# Altium PCB PCB3.PcbDoc (part 3 of 4)
Units mm, origin at the board's own origin, x right, y up, seen from the top; angles counter-clockwise.
Board outline 160 x 194 mm, 2 copper layers (Top Layer, Bottom Layer); 456 components, 297 nets, 1240 pads, 521 vias.
Unrouted connection lines stored in the file: 258.
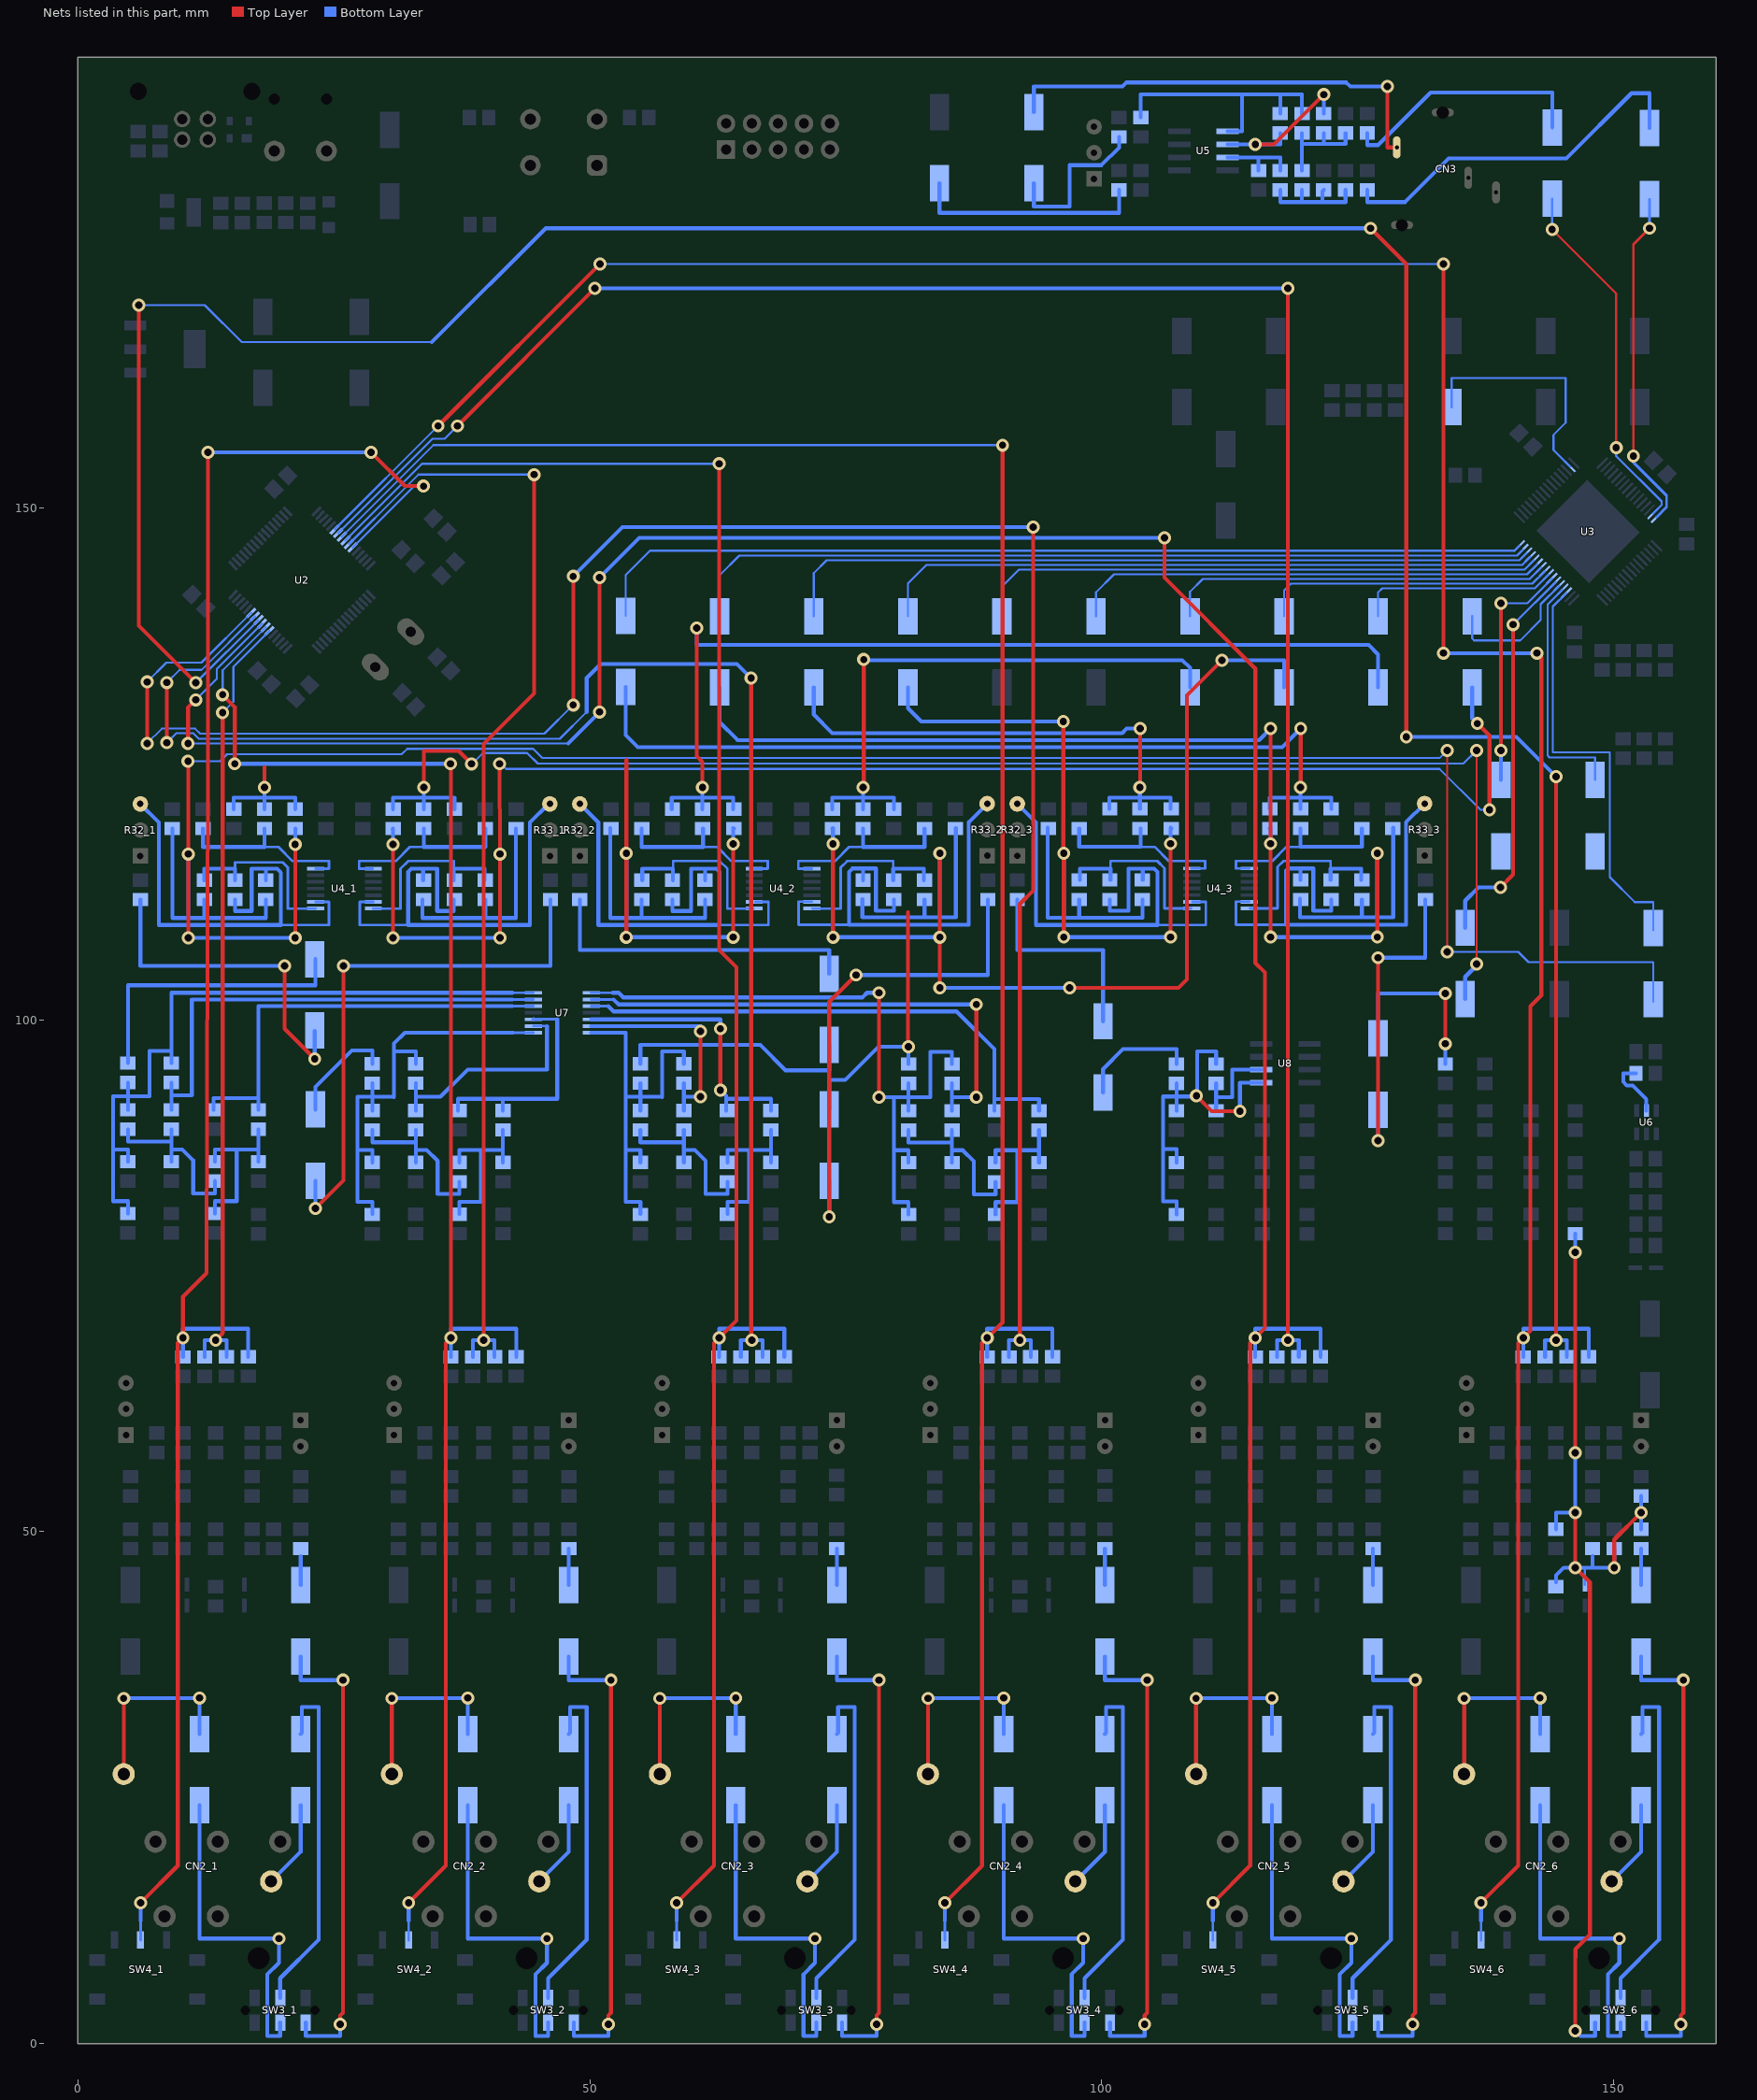
[diagram p3: the nets of this part, all layers, seen from the top]

## Via types
v1: diameter 1.27, hole 0.711, Top Layer to Bottom Layer, 517 vias
v2: diameter 1.4, hole 0.7, Top Layer to Bottom Layer, 4 vias

## Nets (pads, with @x,y where several pads share a name; then routed paths per layer and width w, separated by ;. In a path a pad name is that pad's centre, name@x,y a point inside that pad or via, vN(x,y) a via of type N, cw(c..) or ccw(c..) an arc to the next point about the centre after c; other vN are vias at no path point) (continued)
NetC17_6_2: C17_6.2 D4_6.1 R9_6.1 R10_6.2 R73.2 R74.1 R140.1 R147_6.1 SW3_6.6 | length 107
  Top Layer w0.381: v1(146.25,1.25) 146.25,8.411 146.267,8.428 146.267,9.205 147.687,10.625 147.687,45.042 v1(146.25,46.48) v1(146.25,51.855) ; v1(146.25,57.687) 146.25,71.062 v1(146.25,77.287) ; v1(150.062,46.48) 150.062,49.23 v1(152.687,51.855)
  Bottom Layer w0.254: D4_6.1@147.188,44.815 147.187,46.48
  Bottom Layer w0.381: C17_6.2@144.375,45.055 144.375,45.73 145.125,46.48 v1(146.25,46.48) 147.187,46.48 147.937,46.48 ; R9_6.1@144.375,50.242 144.375,51.855 v1(146.25,51.855) v1(146.25,57.687) ; v1(146.25,1.25) 146.75,0.75 148.187,0.75 SW3_6.6@148.187,2.05 ; v1(146.25,77.287) R140.1@146.25,79.112 ; 147.937,47.592 147.937,46.48 ; R73.2@150.063,48.342 v1(150.062,46.48) 147.937,46.48 ; R10_6.2@152.688,50.242 v1(152.687,51.855) R74.1@152.687,53.48
NetC18_1_1: C18_1.1 R10_1.1 | length 2.8
  Bottom Layer w0.381: C18_1.1@21.75,44.772 21.75,47.592
NetC18_1_2: C18_1.2 SW3_1.4 | length 46
  Top Layer w0.381: v1(25.625,1.875) 25.625,2.75 25.875,3 v1(25.875,35.5)
  Bottom Layer w0.381: C18_1.2@21.75,37.812 21.75,35.5 v1(25.875,35.5) ; SW3_1.4@22.25,2.05 22.25,0.75 25.625,0.75 v1(25.625,1.875)
NetC18_2_1: C18_2.1 R10_2.1 | length 3.6
  Bottom Layer w0.381: C18_2.1@47.937,44.772 R10_2.1@47.937,48.342
NetC18_2_2: C18_2.2 SW3_2.4 | length 46
  Top Layer w0.381: v1(51.812,1.875) 51.812,2.75 52.062,3 v1(52.062,35.5)
  Bottom Layer w0.381: C18_2.2@47.937,37.812 47.937,35.5 v1(52.062,35.5) ; SW3_2.4@48.437,2.05 48.437,0.75 51.812,0.75 v1(51.812,1.875)
NetC18_3_1: C18_3.1 R10_3.1 | length 3.6
  Bottom Layer w0.381: C18_3.1@74.125,44.772 R10_3.1@74.125,48.342
NetC18_3_2: C18_3.2 SW3_3.4 | length 46
  Top Layer w0.381: v1(78,1.875) 78,2.75 78.25,3 v1(78.25,35.5)
  Bottom Layer w0.381: C18_3.2@74.125,37.812 74.125,35.5 v1(78.25,35.5) ; SW3_3.4@74.625,2.05 74.625,0.75 78,0.75 v1(78,1.875)
NetC18_4_1: C18_4.1 R10_4.1 | length 3.6
  Bottom Layer w0.381: C18_4.1@100.312,44.772 R10_4.1@100.312,48.342
NetC18_4_2: C18_4.2 SW3_4.4 | length 46
  Top Layer w0.381: v1(104.188,1.875) 104.188,2.75 104.437,3 v1(104.438,35.5)
  Bottom Layer w0.381: C18_4.2@100.312,37.812 100.312,35.5 v1(104.438,35.5) ; SW3_4.4@100.812,2.05 100.812,0.75 104.188,0.75 v1(104.188,1.875)
NetC18_5_1: C18_5.1 R10_5.1 | length 3.6
  Bottom Layer w0.381: C18_5.1@126.5,44.772 R10_5.1@126.5,48.342
NetC18_5_2: C18_5.2 SW3_5.4 | length 46
  Top Layer w0.381: v1(130.375,1.875) 130.375,2.75 130.625,3 v1(130.625,35.5)
  Bottom Layer w0.381: C18_5.2@126.5,37.812 126.5,35.5 v1(130.625,35.5) ; SW3_5.4@127,2.05 127,0.75 130.375,0.75 v1(130.375,1.875)
NetC18_6_1: C18_6.1 R10_6.1 | length 3.6
  Bottom Layer w0.381: C18_6.1@152.688,44.772 R10_6.1@152.688,48.342
NetC18_6_2: C18_6.2 SW3_6.4 | length 46
  Top Layer w0.381: v1(156.562,1.875) 156.562,2.75 156.812,3 v1(156.812,35.5)
  Bottom Layer w0.381: C18_6.2@152.688,37.812 152.687,35.5 v1(156.812,35.5) ; SW3_6.4@153.187,2.05 153.187,0.75 156.562,0.75 v1(156.562,1.875)
NetC32_1: C32.1 U3.59 | length 46.6
  Bottom Layer w0.203: C32.1@99.438,139.417 99.438,141.75 101.2,143.512 141.557,143.512 U3.59@142.568,144.523
NetC33_1: C33.1 C53_1.1 R24_1.2 R26_1.2 | length 12.3
  Top Layer w0.381: v1(18.216,122.687) 18.216,124.653
  Bottom Layer w0.381: R24_1.2@15.216,120.575 15.216,121.687 18.216,121.687 ; R26_1.2@18.216,120.575 18.216,121.687 ; v1(18.216,122.687) 18.216,121.687 ; C53_1.1@21.216,120.575 21.216,121.687 18.216,121.687
NetC33_2: C33.2 U3.52 | length 23.9
  Bottom Layer w0.203: U3.52@144.903,141.92 U3.52@144.982,141.999 ; U3.52@145.043,142.048 143.562,140.568 143.562,125.812 143.75,125.625 148.187,125.625 C33.2@148.187,123.417
NetC34_1: C34.1 C53_1.2 R28_1.1 R30_1.2 R36_1.2 | length 234.2
  Top Layer w0.203: v1(133.75,106.625) v1(133.75,126.313)
  Top Layer w0.381: v1(10.778,108) v1@10.778,116.062 ; v1(10.778,116.187) v1@10.778,125.25 ; v1(21.216,108) v1(21.216,117.125)
  Bottom Layer w0.203: v1(10.75,125.25) 13.875,125.25 14.565,125.94 15.702,125.94 15.704,125.938 31.625,125.938 32.156,126.469 44.469,126.469 45.375,125.562 133,125.562 v1(133.75,126.313) ; v1(133.75,106.625) 140.688,106.625 141.687,105.625 153.875,105.625 C34.1@153.875,102 C34.1@153.875,101.77
  Bottom Layer w0.381: R28_1.1@9.216,118.675 9.216,109.937 10.778,109.937 ; v1(10.778,108) v1(21.216,108) ; v1(10.778,116.187) 10.778,109.937 ; R36_1.2@12.341,111.737 12.341,109.937 ; R30_1.2@18.341,111.737 18.341,109.937 12.341,109.937 ; v1@21.216,117.25 C53_1.2@21.216,118.675 C53_1.2@21.278,118.612 ; 10.778,109.937 12.341,109.937
NetC34_2: C34.2 U3.51 | length 42.3
  Bottom Layer w0.203: U3.51@144.946,141.256 U3.51@145.08,141.39 ; U3.51@145.232,141.542 U3.51@145.36,141.67 ; U3.51@145.396,141.695 144.063,140.361 144.063,126.125 149.625,126.125 149.625,113.938 152.063,111.5 153.875,111.5 C34.2@153.875,108.96 C34.2@153.875,108.73
NetC35_1: C35.1 U3.15 | length 23.8
  Bottom Layer w0.203: C35.1@134.187,159.833 134.187,162.688 145.312,162.688 145.313,158.313 144.125,157.125 144.125,155.659 U3.15@145.75,154.034
NetC36_1: C36.1 U3.60 | length 55.9
  Bottom Layer w0.203: C36.1@90.25,139.417 90.25,142.313 91.907,143.97 141.307,143.97 U3.60@142.214,144.877
NetC37_1: C37.1 C54_1.1 R25_1.2 R27_1.2 | length 143.6
  Top Layer w0.203: v1(136.625,105.438) v1@136.625,105.562 ; v1(136.625,126.313) v1@136.625,105.562 ; v1@136.75,105.438 v1@136.625,105.562
  Top Layer w0.381: v1(33.778,122.687) 33.778,126.25 37.186,126.25 v1(38.437,124.998)
  Bottom Layer w0.203: v1(38.437,124.998) 38.498,124.998 39.563,126.063 43.875,126.063 44.921,125.016 135.329,125.016 v1(136.625,126.313)
  Bottom Layer w0.381: C54_1.1@30.778,120.575 30.778,121.687 33.778,121.687 ; R27_1.2@33.778,120.575 33.778,121.687 ; v1(33.778,122.687) 33.778,121.687 ; R25_1.2@36.778,120.575 36.778,121.687 33.778,121.687 ; C37.1@135.5,102.02 135.5,104.188 v1@136.688,105.375
NetC37_2: C37.2 U3.54 | length 38.7
  Top Layer w0.381: v1(138.937,112.938) 140.187,114.188 v1(140.187,138.596)
  Bottom Layer w0.203: v1(140.187,138.596) 144.336,142.744 U3.54@144.336,142.755
  Bottom Layer w0.381: C37.2@135.5,108.98 135.5,111.625 136.813,112.938 v1(138.937,112.938)
NetC38_1: C38.1 C54_1.2 R29_1.1 R31_1.2 R37_1.2 | length 177
  Top Layer w0.381: v1(30.778,108) v1(30.778,117.125) ; v1(41.187,125) v1(41.216,116.187) ; v1(41.216,108) v1@41.216,116.063 ; v1(136.687,128.938) 137.875,127.75 v1(137.875,120.5)
  Bottom Layer w0.203: v1@41.187,125.125 41.813,124.5 133,124.5 137,120.5 v1(137.875,120.5)
  Bottom Layer w0.381: C54_1.2@30.716,118.612 C54_1.2@30.778,118.675 v1@30.778,117.25 ; v1(30.778,108) v1(41.216,108) ; R31_1.2@33.653,111.737 33.653,109.937 39.653,109.937 ; R37_1.2@39.778,111.737 39.778,110.063 39.653,109.937 ; v1(41.216,116.187) 41.216,109.938 ; R29_1.1@42.778,118.675 42.778,109.937 41.216,109.937 ; C38.1@136.188,132.458 136.188,129.438 v1(136.687,128.938) ; 39.653,109.937 41.216,109.937
NetC38_2: C38.2 U3.53 | length 13.9
  Bottom Layer w0.203: C38.2@136.188,139.417 136.188,137.25 136.375,137.062 140.875,137.062 142.875,139.063 142.875,140.588 U3.53@144.689,142.402
NetC39_1: C39.1 C53_2.1 R24_2.2 R26_2.2 | length 97.9
  Top Layer w0.381: v1(60.437,138.25) 60.437,125.75 61,125.188 v1(61,122.687)
  Bottom Layer w0.381: R24_2.2@58,120.575 58,121.688 61,121.688 ; v1(60.437,138.25) 60.437,136.625 126.063,136.625 127,135.688 C39.1@127,132.458 ; R26_2.2@61,120.575 61,121.688 ; v1(61,122.687) 61,121.688 ; C53_2.1@64,120.575 64,121.688 61,121.688
NetC39_2: C39.2 U3.56 | length 19.7
  Bottom Layer w0.203: C39.2@127,139.417 127,141.75 127.391,142.141 142.307,142.141 U3.56@143.629,143.463
NetC40_1: C40.1 C53_2.2 R28_2.1 R30_2.2 R36_2.2 | length 66.3
  Top Layer w0.381: v1(53.562,108.063) v1@53.562,116.125 ; v1(53.562,116.25) 53.562,125.375 ; v1(64,108.063) v1(64,117.188)
  Bottom Layer w0.381: R28_2.1@52,118.738 52,109.937 53.562,109.937 ; v1(53.562,108.063) v1(64,108.063) ; v1(53.562,116.25) 53.562,109.937 ; R36_2.2@55.063,111.737 55.063,110 55.125,109.937 ; R30_2.2@61.25,111.737 61.25,109.937 55.125,109.937 ; v1@64,117.313 64,118.738 C53_2.2@64.063,118.675 ; 53.562,109.937 55.125,109.937
NetC40_2: C40.2 U3.55 | length 23.3
  Top Layer w0.381: v1(139,126.313) v1(139,140.688)
  Bottom Layer w0.203: v1(139,140.688) 141.561,140.688 U3.55@143.982,143.109
  Bottom Layer w0.381: C40.2@139,123.417 v1(139,126.313)
NetC41_1: C41.1 C54_2.1 R25_2.2 R27_2.2 | length 57
  Top Layer w0.381: v1(76.687,122.687) 76.75,122.75 v1(76.75,135.187)
  Bottom Layer w0.381: C54_2.1@73.688,120.575 73.687,121.688 76.687,121.688 ; R27_2.2@76.688,120.575 76.687,121.688 ; v1(76.687,122.687) 76.687,121.688 ; v1(76.75,135.187) 76.812,135.125 107.875,135.125 108.625,134.375 C41.1@108.625,132.458 ; R25_2.2@79.688,120.575 79.687,121.688 76.687,121.688
NetC41_2: C41.2 U3.58 | length 37.7
  Bottom Layer w0.203: C41.2@108.625,139.417 108.625,141.813 109.868,143.055 141.807,143.055 U3.58@142.921,144.17
NetC42_1: C42.1 C54_2.2 R29_2.1 R31_2.2 R37_2.2 | length 127.6
  Top Layer w0.381: v1(73.75,108.063) v1(73.75,117.188) ; v1(84.188,103.125) v1(84.188,108.063) v1@84.188,116.125 ; v1(96.875,103.125) 107.5,103.125 108.313,103.938 108.313,131.687 v1(111.75,135.125)
  Bottom Layer w0.381: C54_2.2@73.688,118.675 73.75,118.738 v1@73.75,117.313 ; v1(73.75,108.063) v1(84.188,108.063) ; R31_2.2@76.625,111.8 76.625,110 82.625,110 ; R37_2.2@82.688,111.737 82.688,110.063 82.625,110 ; v1(84.188,103.125) v1(96.875,103.125) ; v1(84.188,116.25) 84.188,110 ; R29_2.1@85.75,118.738 85.75,110 84.187,110 ; v1(111.75,135.125) 117.813,135.125 C42.1@117.813,132.458 ; 82.625,110 84.187,110
NetC42_2: C42.2 U3.57 | length 28.8
  Bottom Layer w0.203: C42.2@117.813,139.417 117.813,141.938 118.473,142.598 142.057,142.598 U3.57@143.275,143.816
NetC43_1: C43.1 C53_3.1 R24_3.2 R26_3.2 | length 51.5
  Top Layer w0.381: v1(103.728,122.7) 103.75,122.722 v1(103.75,128.438)
  Bottom Layer w0.381: C43.1@71.875,132.458 71.875,129.813 73.688,128 102,128 102.437,128.438 v1(103.75,128.438) ; R24_3.2@100.729,120.588 100.729,121.7 103.728,121.7 ; R26_3.2@103.729,120.588 103.728,121.7 ; v1(103.728,122.7) 103.728,121.7 ; C53_3.1@106.729,120.588 106.729,121.7 103.728,121.7
NetC43_2: C43.2 U3.62 | length 74.7
  Bottom Layer w0.203: C43.2@71.875,139.417 71.875,143.625 73.134,144.884 140.807,144.884 U3.62@141.507,145.584
NetC44_1: C44.1 C53_3.2 R28_3.1 R30_3.2 R36_3.2 | length 87.8
  Top Layer w0.381: v1(96.25,129.125) 96.25,116.304 v1(96.291,116.263) ; v1(96.291,108.075) v1@96.291,116.138 ; v1(106.729,108.075) v1(106.729,117.2)
  Bottom Layer w0.381: C44.1@81.063,132.458 81.063,130.437 82.375,129.125 v1(96.25,129.125) ; R28_3.1@94.728,118.75 94.728,109.95 96.291,109.95 ; v1(96.291,108.075) v1(106.729,108.075) ; v1(96.291,116.263) 96.291,109.95 ; R36_3.2@97.791,111.75 97.791,110.013 97.854,109.95 ; R30_3.2@103.979,111.75 103.979,109.95 97.854,109.95 ; v1@106.729,117.325 106.729,118.75 C53_3.2@106.791,118.688 ; 96.291,109.95 97.854,109.95
NetC44_2: C44.2 U3.61 | length 65.1
  Bottom Layer w0.203: C44.2@81.063,139.417 81.063,142.625 82.864,144.427 141.057,144.427 U3.61@141.861,145.23
NetC45_1: C45.1 C54_3.1 R25_3.2 R27_3.2 | length 88
  Top Layer w0.381: v1(119.416,122.7) 119.438,122.722 v1(119.438,128.438)
  Bottom Layer w0.381: C45.1@53.5,132.5 53.5,127.812 54.688,126.625 117.625,126.625 v1(119.438,128.438) ; C54_3.1@116.416,120.588 116.416,121.7 119.416,121.7 ; R27_3.2@119.416,120.588 119.416,121.7 ; v1(119.416,122.7) 119.416,121.7 ; R25_3.2@122.416,120.588 122.416,121.7 119.416,121.7
NetC45_2: C45.2 U3.64 | length 92.5
  Bottom Layer w0.203: C45.2@53.5,139.46 53.5,143.438 55.875,145.812 140.322,145.812 U3.64@140.8,146.291
NetC46_1: C46.1 C54_3.2 R29_3.1 R31_3.2 R37_3.2 | length 126.5
  Top Layer w0.381: v1(116.479,108.075) v1(116.479,117.2) 116.5,117.222 v1(116.5,128.438) ; v1(126.916,108.075) v1@126.916,116.138
  Bottom Layer w0.381: C46.1@62.687,132.458 62.687,129.063 64.438,127.312 115.375,127.312 v1(116.5,128.438) ; C54_3.2@116.416,118.688 116.479,118.75 v1@116.479,117.325 ; v1(116.479,108.075) v1(126.916,108.075) ; R31_3.2@119.353,111.813 119.353,110.013 125.353,110.013 ; R37_3.2@125.416,111.75 125.416,110.075 125.353,110.013 ; v1(126.916,116.263) 126.916,110.013 ; R29_3.1@128.479,118.75 128.479,110.013 126.916,110.013 ; 125.353,110.013 126.916,110.013
NetC46_2: C46.2 U3.63 | length 83.5
  Bottom Layer w0.203: C46.2@62.687,139.417 62.687,143.438 64.591,145.341 140.558,145.341 U3.63@141.154,145.937
NetC47_1_1: C47_1.1 SW3_1.2 | length 34.3
  Bottom Layer w0.381: SW3_1.2@19.75,4.45 19.75,6.375 23.5,10.125 23.5,32.875 21.875,32.875 21.875,30.355 C47_1.1@21.75,30.23
NetC47_1_2: C47_1.2 CN2_1.R | length 8.6
  Bottom Layer w0.381: CN2_1.R@18.867,15.831 21.75,18.714 C47_1.2@21.75,23.27
NetC47_2_1: C47_2.1 SW3_2.2 | length 34.3
  Bottom Layer w0.381: SW3_2.2@45.937,4.45 45.937,6.375 49.688,10.125 49.688,32.875 48.062,32.875 48.062,30.355 C47_2.1@47.937,30.23
NetC47_2_2: C47_2.2 CN2_2.R | length 8.6
  Bottom Layer w0.381: CN2_2.R@45.054,15.831 47.937,18.714 C47_2.2@47.937,23.27
NetC47_3_1: C47_3.1 SW3_3.2 | length 34.3
  Bottom Layer w0.381: SW3_3.2@72.125,4.45 72.125,6.375 75.875,10.125 75.875,32.875 74.25,32.875 74.25,30.355 C47_3.1@74.125,30.23
NetC47_3_2: C47_3.2 CN2_3.R | length 8.6
  Bottom Layer w0.381: CN2_3.R@71.242,15.831 74.125,18.714 C47_3.2@74.125,23.27
NetC47_4_1: C47_4.1 SW3_4.2 | length 34.3
  Bottom Layer w0.381: SW3_4.2@98.312,4.45 98.312,6.375 102.063,10.125 102.063,32.875 100.438,32.875 100.438,30.355 C47_4.1@100.312,30.23
NetC47_4_2: C47_4.2 CN2_4.R | length 8.6
  Bottom Layer w0.381: CN2_4.R@97.429,15.831 100.312,18.714 C47_4.2@100.312,23.27
NetC47_5_1: C47_5.1 SW3_5.2 | length 34.3
  Bottom Layer w0.381: SW3_5.2@124.5,4.45 124.5,6.375 128.25,10.125 128.25,32.875 126.625,32.875 126.625,30.355 C47_5.1@126.5,30.23
NetC47_5_2: C47_5.2 CN2_5.R | length 8.6
  Bottom Layer w0.381: CN2_5.R@123.617,15.831 126.5,18.714 C47_5.2@126.5,23.27
NetC47_6_1: C47_6.1 SW3_6.2 | length 34.3
  Bottom Layer w0.381: SW3_6.2@150.687,4.45 150.687,6.375 154.437,10.125 154.437,32.875 152.812,32.875 152.812,30.355 C47_6.1@152.687,30.23
NetC47_6_2: C47_6.2 CN2_6.R | length 8.6
  Bottom Layer w0.381: CN2_6.R@149.804,15.831 152.687,18.714 C47_6.2@152.687,23.27
NetC48_1_1: C48_1.1 SW3_1.5 | length 33.3
  Bottom Layer w0.381: C48_1.1@11.875,23.27 11.875,16.688 11.875,10.25 v1(19.625,10.25) 19.625,7.875 18.5,6.75 18.5,0.75 19.75,0.75 SW3_1.5@19.75,2.05
NetC48_1_2: C48_1.2 CN2_1.T | length 18.3
  Top Layer w0.381: CN2_1.T@4.465,26.322 v1(4.465,33.715) v1@4.5,33.75
  Bottom Layer w0.381: v1@4.5,33.75 v1(11.875,33.75) C48_1.2@11.875,30.23
NetC48_2_1: C48_2.1 SW3_2.5 | length 33.3
  Bottom Layer w0.381: C48_2.1@38.062,23.27 38.062,16.688 38.062,10.25 v1(45.812,10.25) 45.812,7.875 44.687,6.75 44.687,0.75 45.937,0.75 SW3_2.5@45.937,2.05
NetC48_2_2: C48_2.2 CN2_2.T | length 18.3
  Top Layer w0.381: CN2_2.T@30.653,26.322 v1(30.653,33.715) v1@30.688,33.75
  Bottom Layer w0.381: v1@30.688,33.75 v1(38.063,33.75) C48_2.2@38.063,30.23
NetC48_3_1: C48_3.1 SW3_3.5 | length 33.3
  Bottom Layer w0.381: C48_3.1@64.25,23.27 64.25,16.688 64.25,10.25 v1(72,10.25) 72,7.875 70.875,6.75 70.875,0.75 72.125,0.75 SW3_3.5@72.125,2.05
NetC48_3_2: C48_3.2 CN2_3.T | length 18.3
  Top Layer w0.381: CN2_3.T@56.84,26.322 v1(56.84,33.715) v1@56.875,33.75
  Bottom Layer w0.381: v1@56.875,33.75 v1(64.25,33.75) C48_3.2@64.25,30.23
NetC48_4_1: C48_4.1 SW3_4.5 | length 33.3
  Bottom Layer w0.381: C48_4.1@90.438,23.27 90.438,16.688 90.438,10.25 v1(98.187,10.25) 98.187,7.875 97.062,6.75 97.062,0.75 98.312,0.75 SW3_4.5@98.312,2.05
NetC48_4_2: C48_4.2 CN2_4.T | length 18.3
  Top Layer w0.381: CN2_4.T@83.028,26.322 v1(83.028,33.715) v1@83.063,33.75
  Bottom Layer w0.381: v1@83.063,33.75 v1(90.438,33.75) C48_4.2@90.438,30.23
NetC48_5_1: C48_5.1 SW3_5.5 | length 33.3
  Bottom Layer w0.381: C48_5.1@116.625,23.27 116.625,16.688 116.625,10.25 v1(124.375,10.25) 124.375,7.875 123.25,6.75 123.25,0.75 124.5,0.75 SW3_5.5@124.5,2.05
NetC48_5_2: C48_5.2 CN2_5.T | length 18.3
  Top Layer w0.381: CN2_5.T@109.215,26.322 v1(109.215,33.715) v1@109.25,33.75
  Bottom Layer w0.381: v1@109.25,33.75 v1(116.625,33.75) C48_5.2@116.625,30.23
NetC48_6_1: C48_6.1 SW3_6.5 | length 33.3
  Bottom Layer w0.381: C48_6.1@142.812,23.27 142.812,16.688 142.812,10.25 v1(150.562,10.25) 150.562,7.875 149.437,6.75 149.437,0.75 150.687,0.75 SW3_6.5@150.687,2.05
NetC48_6_2: C48_6.2 CN2_6.T | length 18.3
  Top Layer w0.381: CN2_6.T@135.403,26.322 v1(135.403,33.715) v1@135.438,33.75
  Bottom Layer w0.381: v1@135.438,33.75 v1(142.813,33.75) C48_6.2@142.813,30.23
NetC49_1_1: C49_1.1 R23_1.2 U2.22 | length 76.9
  Top Layer w0.381: v1(13.445,68.688) 14.163,69.406 14.125,69.444 v1(14.125,130)
  Bottom Layer w0.203: v1(14.125,130) 15.188,131.062 15.188,134.48 U2.22@18.695,137.988
  Bottom Layer w0.381: R23_1.2@12.383,67.052 12.383,68.688 v1(13.445,68.688) 14.508,68.688 C49_1.1@14.508,67.085
NetC49_2_1: C49_2.1 R23_2.2 U2.58 | length 112.9
  Top Layer w0.381: v1(39.625,68.688) 39.625,126.938 44.562,131.875 v1(44.562,153.25)
  Bottom Layer w0.203: U2.58@26.473,146.473 31.625,151.625 33.25,153.25 v1(44.562,153.25)
  Bottom Layer w0.381: R23_2.2@38.563,67.052 38.563,68.688 v1(39.625,68.688) 40.688,68.688 C49_2.1@40.688,67.085
NetC49_3_1: C49_3.1 R23_3.2 U2.26 | length 150.4
  Top Layer w0.381: v1(8.688,127.062) v1(8.688,132.937) ; v1@65.75,68.688 65.75,124.312 v1(65.75,133.375)
  Bottom Layer w0.203: v1(8.688,127.062) 9.625,128 11.25,128 11.813,127.437 47.062,127.437 49.688,130.063 ; v1(8.688,132.937) 9.938,134.187 12.066,134.187 U2.26@17.281,139.402
  Bottom Layer w0.381: 49.688,130.063 49.688,133.375 51.062,134.75 64.375,134.75 v1(65.75,133.375) ; R23_3.2@64.75,67.052 64.75,68.688 v1(65.813,68.688) 66.875,68.688 C49_3.1@66.875,67.085
NetC49_4_1: C49_4.1 R23_4.2 U2.27 | length 207.4
  Top Layer w0.381: v1(6.75,127) v1(6.75,133) ; v1(48.375,130.75) v1(48.375,143.313) ; v1(92,68.688) 92,110.063 92,111.313 93.313,112.625 v1(93.313,148.125)
  Bottom Layer w0.203: v1(6.75,127) 8.187,128.438 11.438,128.438 11.938,127.937 45.563,127.937 v1(48.375,130.75) ; v1(6.75,133) 8.625,134.875 12.047,134.875 U2.27@16.927,139.756
  Bottom Layer w0.381: v1(48.375,143.313) 53.187,148.125 v1(93.313,148.125) ; R23_4.2@90.938,67.052 90.938,68.688 v1(92,68.688) 93.063,68.688 C49_4.1@93.063,67.085
NetC49_5_1: C49_5.1 R23_5.2 U2.55 | length 210.8
  Top Layer w0.381: v1(37.062,158) v1(50.5,171.438) ; v1(118.188,68.688) 118.187,99.813 v1(118.187,171.438)
  Bottom Layer w0.203: U2.55@25.413,147.534 34.629,156.75 35.812,156.75 v1(37.062,158)
  Bottom Layer w0.381: v1(50.5,171.438) v1(118.187,171.438) ; R23_5.2@117.125,67.052 117.125,68.688 v1(118.188,68.688) 119.25,68.688 C49_5.1@119.25,67.085
NetC49_6_1: C49_6.1 R23_6.2 U2.25 | length 302.2
  Top Layer w0.381: v1(5.937,169.813) 5.937,138.476 v1(11.5,132.914) ; v1(126.25,177.313) 129.75,173.812 v1(129.75,127.625) ; v1(144.375,68.688) 144.375,100.438 v1(144.375,123.75)
  Bottom Layer w0.203: v1(5.937,169.813) 12.375,169.813 16,166.188 34.563,166.188 ; v1(11.5,132.914) U2.25@17.634,139.048 U2.25@17.574,139.048
  Bottom Layer w0.381: 34.563,166.188 45.688,177.313 v1(126.25,177.313) ; v1(129.75,127.625) 140.5,127.625 v1(144.375,123.75) ; R23_6.2@143.312,67.052 143.313,68.688 v1(144.375,68.688) 145.438,68.688 C49_6.1@145.437,67.085
NetC50_1_1: C50_1.1 R22_1.1 SW4_1.2 U2.59 | length 191.7
  Top Layer w0.381: v1(6.11,13.735) 9.75,17.375 9.75,62.125 9.75,68.437 v1(10.25,68.937) 10.25,72.937 12.559,75.246 12.693,124.749 v1(12.693,155.437) ; v1(28.625,155.437) 31.938,152.125 v1(33.75,152.125)
  Bottom Layer w0.203: U2.59@26.827,146.119 32.832,152.125 v1(33.75,152.125)
  Bottom Layer w0.254: SW4_1.2@6.11,10.1 6.11,12
  Bottom Layer w0.381: 6.11,12 v1(6.11,13.735) ; R22_1.1@10.25,67.052 v1(10.25,68.937) 10.25,69.812 16.633,69.812 C50_1.1@16.633,67.085 ; v1(12.693,155.437) v1(28.625,155.437)
NetC50_2_1: C50_2.1 R22_2.1 SW4_2.2 U2.23 | length 165.3
  Top Layer w0.381: v1(14.125,131.75) 15.312,130.563 v1(15.312,125) ; v1(32.297,13.735) 35.937,17.375 35.937,62.125 35.937,68.437 v1(36.437,68.937) 36.437,125 36.437,125.063 v1(36.375,125)
  Bottom Layer w0.203: v1(14.125,131.75) 14.125,134.125 U2.23@18.342,138.341
  Bottom Layer w0.254: SW4_2.2@32.297,10.1 32.297,12
  Bottom Layer w0.381: v1(15.312,125) v1(36.375,125) ; 32.297,12 v1(32.297,13.735) ; R22_2.1@36.43,67.052 36.43,69.812 42.813,69.812 C50_2.1@42.813,67.085
NetC50_3_1: C50_3.1 R22_3.1 SW4_3.2 U2.57 | length 198.8
  Top Layer w0.381: v1(58.485,13.735) 62.125,17.375 62.125,62.125 62.125,68.437 v1(62.625,68.937) 64.313,70.625 64.312,105.125 62.625,106.812 v1(62.625,154.312)
  Bottom Layer w0.203: U2.57@26.12,146.827 33.606,154.312 v1(62.625,154.312)
  Bottom Layer w0.254: SW4_3.2@58.485,10.1 58.485,12
  Bottom Layer w0.381: 58.485,12 v1(58.485,13.735) ; R22_3.1@62.617,67.052 62.617,69.812 69,69.812 C50_3.1@69,67.085
NetC50_4_1: C50_4.1 R22_4.1 SW4_4.2 U2.56 | length 228.5
  Top Layer w0.381: v1(84.672,13.735) 88.313,17.375 88.312,62.125 88.312,68.437 v1(88.812,68.937) 90.313,70.438 90.312,110.813 v1(90.312,156.125)
  Bottom Layer w0.203: U2.56@25.766,147.18 34.711,156.125 v1(90.312,156.125)
  Bottom Layer w0.254: SW4_4.2@84.672,10.1 84.672,12
  Bottom Layer w0.381: 84.672,12 v1(84.672,13.735) ; R22_4.1@88.805,67.052 88.805,69.812 95.188,69.812 C50_4.1@95.188,67.085
NetC50_5_1: C50_5.1 R22_5.1 SW4_5.2 U2.24 | length 281.1
  Top Layer w0.381: v1(10.75,127) 10.75,130.5 v1(11.5,131.25) ; v1(50.938,130.063) v1(50.938,143.188) ; v1(106.125,147.062) 106.125,143.188 115,134.312 115,105.562 115.937,104.625 115.938,69.875 v1(115,68.937) 114.5,68.437 114.5,62.125 114.5,17.375 v1(110.86,13.735)
  Bottom Layer w0.203: v1(10.75,127) 32.113,127 47.875,127 ; v1(11.5,131.25) 13.563,133.312 13.563,134.269 U2.24@17.988,138.695
  Bottom Layer w0.254: SW4_5.2@110.86,10.1 110.86,12
  Bottom Layer w0.381: 47.875,127 v1(50.938,130.063) ; v1(50.938,143.188) 54.812,147.062 v1(106.125,147.062) ; 110.86,12 v1(110.86,13.735) ; R22_5.1@114.992,67.052 114.992,69.812 121.375,69.812 C50_5.1@121.375,67.085
NetC50_6_1: C50_6.1 R22_6.1 SW4_6.2 U2.54 | length 306.4
  Top Layer w0.381: v1(35.172,158) v1(50.984,173.812) ; v1(133.375,135.812) v1(133.375,173.812) ; v1(137.047,13.735) 140.687,17.375 140.687,62.125 140.687,68.437 v1(141.188,68.937) 141.875,69.625 141.875,100.562 141.875,101.312 142.937,102.375 142.937,135.375 v1(142.5,135.812)
  Bottom Layer w0.203: U2.54@25.059,147.887 v1(35.172,158) ; v1(50.984,173.812) v1(133.375,173.812)
  Bottom Layer w0.254: SW4_6.2@137.047,10.1 137.047,12
  Bottom Layer w0.381: v1(133.375,135.812) v1(142.5,135.812) ; 137.047,12 v1(137.047,13.735) ; R22_6.1@141.18,67.052 141.18,69.812 147.563,69.812 C50_6.1@147.563,67.085
NetC51_1_1: C51_1.1 R26_1.1 U4_1.7 | length 18.5
  Bottom Layer w0.254: 18.216,116.875 19.591,116.875 20.966,115.5 24.528,115.5 24.528,114.762 U4_1.7@23.209,114.762
  Bottom Layer w0.381: C51_1.1@12.216,118.675 12.216,116.875 18.216,116.875 R26_1.1@18.216,118.675
NetC51_2_1: C51_2.1 R26_2.1 U4_2.7 | length 18.5
  Bottom Layer w0.254: 61.063,116.875 62.438,116.875 63.813,115.5 67.375,115.5 67.375,114.763 U4_2.7@66.056,114.762
  Bottom Layer w0.381: C51_2.1@55.063,118.675 55.063,116.875 61.063,116.875 R26_2.1@61.063,118.675
NetC51_3_1: C51_3.1 R26_3.1 U4_3.7 | length 18.5
  Bottom Layer w0.254: 103.791,116.888 105.166,116.888 106.541,115.513 110.104,115.513 110.104,114.775 U4_3.7@108.784,114.775
  Bottom Layer w0.381: C51_3.1@97.791,118.688 97.791,116.888 103.791,116.888 R26_3.1@103.791,118.688
NetC52_1_1: C52_1.1 R27_1.1 U4_1.8 | length 18.5
  Bottom Layer w0.254: U4_1.8@28.785,114.762 27.466,114.762 27.466,115.5 31.028,115.5 32.403,116.875 33.778,116.875
  Bottom Layer w0.381: R27_1.1@33.778,118.675 33.778,116.875 39.778,116.875 C52_1.1@39.778,118.675
NetC52_2_1: C52_2.1 R27_2.1 U4_2.8 | length 18.5
  Bottom Layer w0.254: U4_2.8@71.694,114.763 70.375,114.763 70.375,115.5 73.937,115.5 75.312,116.875 76.687,116.875
  Bottom Layer w0.381: R27_2.1@76.688,118.675 76.687,116.875 82.688,116.875 C52_2.1@82.688,118.675
NetC52_3_1: C52_3.1 R27_3.1 U4_3.8 | length 18.5
  Bottom Layer w0.254: U4_3.8@114.423,114.775 113.103,114.775 113.103,115.513 116.666,115.513 118.041,116.888 119.416,116.888
  Bottom Layer w0.381: R27_3.1@119.416,118.688 119.416,116.888 125.416,116.888 C52_3.1@125.416,118.688
NetC55_1_1: C55_1.1 R36_1.1 U4_1.1 | length 17.9
  Bottom Layer w0.254: 15.341,114.75 15.341,115.375 20,115.375 20.5,114.875 20.5,110.862 U4_1.1@23.209,110.862
  Bottom Layer w0.381: R36_1.1@12.341,113.637 12.341,114.75 15.341,114.75 C55_1.1@15.341,113.637
NetC55_1_2: C55_1.2 R30_1.1 R32_1.3 U4_1.2 | length 48.9
  Bottom Layer w0.254: 19.813,109.25 24.516,109.25 24.516,111.512 U4_1.2@23.209,111.512
  Bottom Layer w0.381: R32_1.3@6.091,121.08 7.903,119.267 7.903,109.25 19.813,109.25 19.813,114.375 19.437,114.75 18.341,114.75 ; C55_1.2@15.341,111.737 15.341,110.625 16.966,110.625 16.966,114.75 18.341,114.75 ; R30_1.1@18.341,113.637 18.341,114.75
NetC55_2_1: C55_2.1 R36_2.1 U4_2.1 | length 18
  Bottom Layer w0.254: 58.125,114.75 58.125,115.5 62.687,115.5 63.438,114.75 63.438,110.862 U4_2.1@65.993,110.862
  Bottom Layer w0.381: R36_2.1@55.125,113.638 55.125,114.75 58.125,114.75 C55_2.1@58.125,113.638
NetC55_2_2: C55_2.2 R30_2.1 R32_2.3 U4_2.2 | length 49.1
  Bottom Layer w0.254: 62.687,109.25 67.446,109.25 67.446,111.512 U4_2.2@66.14,111.512
  Bottom Layer w0.381: R32_2.3@49.021,121.08 50.834,119.267 50.834,109.25 62.687,109.25 62.687,114.437 62.375,114.75 61.272,114.75 ; C55_2.2@58.063,111.737 58.063,110.625 59.896,110.625 59.896,114.75 61.272,114.75 ; R30_2.1@61.272,113.637 61.272,114.75
NetC55_3_1: C55_3.1 R36_3.1 U4_3.1 | length 18.1
  Bottom Layer w0.254: 100.854,114.763 100.854,115.513 105.425,115.513 106.125,114.813 106.125,110.875 U4_3.1@108.722,110.875
  Bottom Layer w0.381: R36_3.1@97.854,113.65 97.854,114.763 100.854,114.763 C55_3.1@100.854,113.65
NetC55_3_2: C55_3.2 R30_3.1 R32_3.3 U4_3.2 | length 49.1
  Bottom Layer w0.254: 105.438,109.262 105.5,109.262 110.175,109.262 110.175,111.525 U4_3.2@108.868,111.525
  Bottom Layer w0.381: R32_3.3@91.75,121.092 93.563,119.28 93.563,109.262 105.438,109.262 105.438,114.45 105.125,114.763 104,114.763 ; C55_3.2@100.791,111.75 100.791,110.638 102.625,110.638 102.625,114.763 104,114.763 ; R30_3.1@104,113.65 104,114.763
NetC56_1_1: C56_1.1 R37_1.1 U4_1.14 | length 18
  Bottom Layer w0.254: U4_1.14@28.848,110.862 31.5,110.862 31.5,114.75 32.25,115.5 36.716,115.5 36.716,114.75
  Bottom Layer w0.381: C56_1.1@36.716,113.637 36.716,114.75 39.716,114.75 R37_1.1@39.716,113.637
NetC56_1_2: C56_1.2 R31_1.1 R33_1.3 U4_1.13 | length 48.9
  Bottom Layer w0.254: U4_1.13@28.848,111.512 27.541,111.512 27.541,109.25 32.25,109.25
  Bottom Layer w0.381: R31_1.1@33.716,113.637 33.716,114.75 ; C56_1.2@36.716,111.737 36.716,110.625 35.091,110.625 35.091,114.75 33.716,114.75 ; R33_1.3@45.966,121.08 44.153,119.267 44.153,109.25 32.25,109.25 32.25,114.437 32.563,114.75 33.716,114.75
NetC56_2_1: C56_2.1 R37_2.1 U4_2.14 | length 18.1
  Bottom Layer w0.254: U4_2.14@71.757,110.862 74.5,110.862 74.5,114.875 75.125,115.5 79.625,115.5 79.625,114.75
  Bottom Layer w0.381: C56_2.1@79.625,113.638 79.625,114.75 82.625,114.75 R37_2.1@82.625,113.638
NetC56_2_2: C56_2.2 R31_2.1 R33_2.3 U4_2.13 | length 48.8
  Bottom Layer w0.254: U4_2.13@71.694,111.535 70.387,111.535 70.387,109.273 75.313,109.273
  Bottom Layer w0.381: R31_2.1@76.688,113.637 76.688,114.647 76.562,114.773 ; C56_2.2@79.688,111.737 79.688,110.648 77.937,110.648 77.937,114.773 76.562,114.773 ; R33_2.3@88.812,121.103 87,119.29 87,109.273 75.313,109.273 75.313,114.438 75.648,114.773 76.562,114.773
NetC56_3_1: C56_3.1 R37_3.1 U4_3.14 | length 18.1
  Bottom Layer w0.254: U4_3.14@114.485,110.875 117.187,110.875 117.187,114.937 117.763,115.513 122.353,115.513 122.353,114.763
  Bottom Layer w0.381: C56_3.1@122.353,113.65 122.353,114.763 125.353,114.763 R37_3.1@125.353,113.65
NetC56_3_2: C56_3.2 R31_3.1 R33_3.3 U4_3.13 | length 49
  Bottom Layer w0.254: U4_3.13@114.423,111.548 113.116,111.548 113.116,109.285 118,109.285
  Bottom Layer w0.381: R31_3.1@119.416,113.65 119.416,114.66 119.291,114.785 ; C56_3.2@122.416,111.75 122.416,110.66 120.666,110.66 120.666,114.785 119.291,114.785 ; R33_3.3@131.541,121.115 129.729,119.303 129.729,109.285 118,109.285 118,114.562 118.223,114.785 119.291,114.785
NetC57_1_1: C57_1.1 R34_1.1 | length 33.6
  Top Layer w0.381: v1(20.188,105.25) 20.188,99.125 v1(23.125,96.187)
  Bottom Layer w0.381: R34_1.1@6.091,111.737 6.091,105.25 v1(20.188,105.25) ; v1(23.125,96.187) C57_1.1@23.125,98.895
NetC57_1_2: C57_1.2 R84.2 | length 28.5
  Bottom Layer w0.381: R84.2@4.875,95.763 4.875,103.375 23.187,103.375 C57_1.2@23.187,105.917
NetC57_2_1: C57_2.1 R34_2.1 | length 31.6
  Bottom Layer w0.381: R34_2.1@49.021,111.737 49.021,106.812 73.375,106.812 C57_2.1@73.375,104.5
NetC57_2_2: C57_2.2 R106.2 | length 23.8
  Bottom Layer w0.381: R106.2@54.938,95.7 54.938,97.535 66.653,97.535 69.125,95.062 73.375,95.062 C57_2.2@73.375,97.54
NetC57_3_1: C57_3.1 R34_3.1 | length 20.3
  Bottom Layer w0.381: R34_3.1@91.75,111.75 91.75,106.825 100.125,106.825 C57_3.1@100.125,99.855
NetC57_3_2: C57_3.2 R128.2 | length 11.7
  Bottom Layer w0.381: C57_3.2@100.125,92.895 100.125,95.188 102.062,97.125 107.309,97.125 R128.2@107.309,95.675
NetC58_1_1: C58_1.1 R35_1.1 | length 54.2
  Top Layer w0.381: v1(23.188,81.562) 25.937,84.312 v1(25.937,105.25)
  Bottom Layer w0.381: v1(23.188,81.562) C58_1.1@23.188,84.27 ; v1(25.937,105.25) 46.153,105.25 R35_1.1@46.153,111.737
NetC58_1_2: C58_1.2 R95.2 | length 10.5
  Bottom Layer w0.381: C58_1.2@23.188,91.23 23.188,93.438 26.75,97 28.75,97 R95.2@28.75,95.7
NetC58_2_1: C58_2.1 R35_2.1 | length 48.5
  Top Layer w0.381: v1(73.375,80.75) 73.375,101.75 v1(76,104.375)
  Bottom Layer w0.381: v1(73.375,80.75) C58_2.1@73.375,84.27 ; v1(76,104.375) 88.875,104.375 R35_2.1@88.875,111.737
NetC58_2_2: C58_2.2 R117.2 | length 26.8
  Top Layer w0.381: v1@81.062,97.375 81.062,110.497
  Bottom Layer w0.381: C58_2.2@73.375,91.23 73.375,94.125 74.938,94.125 78.188,97.375 v1(81.125,97.375) R117.2@81.125,95.675
NetC58_3_1: C58_3.1 R35_3.1 | length 32.9
  Top Layer w0.381: v1(127,88.187) v1(127,106.063)
  Bottom Layer w0.381: v1(127,88.187) C58_3.1@127,92.875 ; v1(127,106.063) 131.604,106.063 R35_3.1@131.604,111.75
NetC58_3_2: C58_3.2 R139.2 | length 16.2
  Top Layer w0.381: v1@133.563,97.5 v1(133.563,97.655) v1(133.562,102.562)
  Bottom Layer w0.381: C58_3.2@127,99.835 127,102.562 v1(133.562,102.562) ; R139.2@133.563,95.675 v1@133.563,97.5
NetC61_1: C61.1 R38.2 R42.1 U5.1 | length 26.8
  Bottom Layer w0.381: R42.1@103.812,188.137 103.812,190.39 113.687,190.39 ; U5.1@112.3,186.78 113.717,186.78 113.717,190.36 113.687,190.39 ; C61.1@117.437,188.512 117.437,190.39 ; R38.2@119.562,188.512 119.562,190.39 117.437,190.39 ; 113.687,190.39 117.437,190.39
NetC61_2: C61.2 R41.2 U5.2 | length 16.8
  Top Layer w0.381: v1(115,185.5) 116.812,185.5 v1(121.687,190.375)
  Bottom Layer w0.381: U5.2@112.3,185.51 117.437,185.51 C61.2@117.437,186.612 ; R41.2@121.687,188.512 v1(121.687,190.375)
NetC62_1: C62.1 R39.1 | length 24.8
  Bottom Layer w0.381: R39.1@125.937,186.612 125.937,185.437 127,185.437 132.125,190.562 144,190.562 C62.1@144,187.167
NetC62_2: C62.2 U3.31 | length 35.9
  Top Layer w0.203: v1(144,177.187) 150.25,170.937 v1(150.25,155.875) 150.121,155.875 v1@149.934,155.687
  Bottom Layer w0.203: v1(144,177.187) C62.2@144,180.208 ; v1(150.25,155.875) 150.25,155.063 154.688,150.625 154.688,150.279 U3.31@153.846,149.438
NetC63_1: C63.1 R38.1 R40.2 R41.1 | length 9.9
  Bottom Layer w0.381: C63.1@119.562,182.95 119.562,185.437 ; R38.1@119.562,186.612 119.562,185.562 121.687,185.562 ; R41.1@121.687,186.612 121.687,185.562 ; R40.2@123.812,186.612 123.812,185.562 121.687,185.562
NetC63_2: C63.2 R44.2 R45.1 R48.2 | length 11.1
  Bottom Layer w0.381: R45.1@117.437,181.05 117.437,179.875 119.562,179.875 ; C63.2@119.562,181.05 119.562,179.875 ; R48.2@121.687,181.05 121.562,180.925 121.562,179.875 ; R44.2@123.812,181.05 123.812,179.875 121.562,179.875 ; 119.562,179.875 121.562,179.875
NetC64_1: C64.1 R46.2 | length 16.4
  Bottom Layer w0.381: C64.1@93.375,181.708 93.375,179.447 96.875,179.447 96.875,183.481 99.981,183.481 101.687,185.187 R46.2@101.687,186.237
NetC64_2: C64.2 CN3.5 | length 44.2
  Top Layer w0.381: v1(127.91,191.152) 127.91,185.215 CN3.5@128.817,185.215
  Bottom Layer w0.381: C64.2@93.375,188.667 93.375,191.152 102.009,191.152 102.402,191.545 123.892,191.545 124.285,191.152 v1(127.91,191.152)
NetC65_1: C65.1 R43.1 | length 36.5
  Bottom Layer w0.381: R43.1@125.937,181.05 125.937,179.875 129.625,179.875 133.875,184.125 145.375,184.125 151.75,190.5 153.5,190.5 C65.1@153.5,187.105
NetC65_2: C65.2 U3.32 | length 33.5
  Top Layer w0.254: v1(151.936,155.061) 151.936,175.748 v1(153.5,177.312)
  Bottom Layer w0.254: v1(151.936,155.061) 151.936,154.439 155.17,151.205 155.17,150.068 154.2,149.097 U3.32@154.2,149.084 ; v1(153.5,177.312) C65.2@153.5,180.145
NetC66_1: C66.1 R45.2 U5.3 | length 7.7
  Bottom Layer w0.381: U5.3@112.3,184.24 115.312,184.24 ; C66.1@115.312,182.95 115.312,184.24 ; R45.2@117.437,182.95 117.437,184.24 115.312,184.24
NetC67_1: C67.1 R50.1 | length 22.7
  Bottom Layer w0.381: C67.1@84.152,181.708 84.152,178.812 101.687,178.812 R50.1@101.687,181.05
NetC70_1: C70.1 U6.5 | length 6.1
  Bottom Layer w0.381: C70.1@152.187,94.765 150.948,94.765 150.948,93.927 151.288,93.587 151.85,93.587 153.2,92.237 U6.5@153.2,91.125
NetC71_1: C71.1 R78.2 R79.2 R80.1 R84.1 U7.7 | length 70.6
  Bottom Layer w0.254: 42.437,102.637 U7.7@44.493,102.637
  Bottom Layer w0.381: R79.2@4.875,81.075 4.875,82.275 3.438,82.275 3.438,87.338 ; R80.1@4.875,86.138 4.875,87.338 3.438,87.338 ; R78.2@4.875,91.2 4.875,92.531 ; R84.1@4.875,93.862 4.875,92.531 ; 6.994,92.531 4.875,92.531 ; 7,92.525 7,96.963 9.125,96.963 ; C71.1@9.125,95.763 9.125,96.963 ; 42.437,102.637 9.125,102.637 9.125,96.963 ; 3.438,87.338 3.438,92.531 4.875,92.531
NetC71_2: C71.2 R83.2 U7.6 | length 47.4
  Bottom Layer w0.254: 42.437,101.987 U7.6@44.493,101.987
  Bottom Layer w0.381: R83.2@9.125,91.2 9.125,92.625 ; C71.2@9.125,93.862 9.125,92.625 ; 42.437,101.987 11.125,101.987 11.125,92.625 9.125,92.625
NetC72_1: C72.1 R78.1 R82.2 R83.1 | length 17.7
  Bottom Layer w0.381: R78.1@4.875,89.3 4.875,88.1 9.125,88.1 ; R82.2@9.125,86.138 9.125,87.338 ; R83.1@9.125,89.3 9.125,88.1 ; C72.1@13.375,84.237 13.375,83.037 11.25,83.037 11.25,86.275 10.188,87.338 9.125,87.338 ; 9.125,87.338 9.125,88.1
NetC72_2: C72.2 R86.2 R87.1 R88.2 | length 17
  Bottom Layer w0.381: R88.2@13.375,81.075 13.375,82.275 15.5,82.275 15.5,87.338 ; C72.2@13.375,86.138 13.375,87.338 15.5,87.338 ; R86.2@17.625,86.138 17.625,87.338 ; R87.1@17.625,89.3 17.625,87.338 ; 15.5,87.338 17.625,87.338
NetC73_1: C73.1 R87.2 U7.5 | length 42.5
  Bottom Layer w0.254: 42.437,101.337 U7.5@44.493,101.337
  Bottom Layer w0.381: C73.1@13.25,91.2 13.25,92.338 17.625,92.338 ; R87.2@17.625,91.2 17.625,92.338 ; 42.437,101.337 17.625,101.337 17.625,92.338
NetC74_1: C74.1 R89.2 R90.2 R91.1 R95.1 U7.1 | length 44.3
  Bottom Layer w0.254: 42.5,98.737 U7.1@44.493,98.737
  Bottom Layer w0.381: R90.2@28.75,81.012 28.75,82.213 27.313,82.213 27.313,87.275 ; R91.1@28.75,86.075 28.75,87.275 27.313,87.275 ; R89.2@28.75,91.138 28.75,92.469 ; R95.1@28.75,93.8 28.75,92.469 ; 30.869,92.469 28.75,92.469 ; 30.875,92.463 30.875,96.9 ; C74.1@33,95.7 33,96.9 30.875,96.9 ; 42.5,98.737 31.933,98.737 30.875,97.68 30.875,96.9 ; 27.313,87.275 27.313,92.469 28.75,92.469
NetC74_2: C74.2 R94.2 U7.2 | length 22.2
  Bottom Layer w0.254: U7.2@44.493,99.387 45.812,99.387
  Bottom Layer w0.381: R94.2@33,91.138 33,92.469 ; C74.2@33,93.8 33,92.469 ; 45.812,99.387 45.812,95.125 38.062,95.125 35.406,92.469 33,92.469
NetC75_1: C75.1 R89.1 R93.2 R94.1 | length 17.7
  Bottom Layer w0.381: R89.1@28.75,89.237 28.75,88.037 33,88.037 ; R93.2@33,86.075 33,87.275 ; R94.1@33,89.237 33,88.037 ; C75.1@37.25,84.175 37.25,82.975 35.125,82.975 35.125,86.213 34.063,87.275 33,87.275 ; 33,87.275 33,88.037
NetC75_2: C75.2 R98.2 R99.1 R100.2 | length 17
  Bottom Layer w0.381: R100.2@37.25,81.012 37.25,82.213 39.375,82.213 39.375,87.275 ; C75.2@37.25,86.075 37.25,87.275 39.375,87.275 ; R98.2@41.5,86.075 41.5,87.275 ; R99.1@41.5,89.237 41.5,87.275 ; 39.375,87.275 41.5,87.275
NetC76_1: C76.1 R96.2 R101.2 R102.1 R106.1 U7.14 | length 39.1
  Bottom Layer w0.381: U7.14@50.132,98.738 53.5,98.738 53.5,92.469 ; R101.2@54.938,81.012 54.938,82.213 53.5,82.213 53.5,87.275 ; R102.1@54.938,86.075 54.938,87.275 53.5,87.275 ; R96.2@54.938,91.138 54.938,92.469 ; R106.1@54.938,93.8 54.938,92.469 ; 57.056,92.469 54.938,92.469 ; 57.063,92.463 57.063,96.9 59.188,96.9 C76.1@59.188,95.7 ; 53.5,87.275 53.5,92.469 ; 53.5,92.469 54.938,92.469
NetC76_2: C76.2 R105.2 U7.13 | length 21.9
  Top Layer w0.381: v1(60.812,92.469) v1(60.812,98.875)
  Bottom Layer w0.381: U7.13@50.132,99.387 60.812,99.387 v1(60.812,98.875) ; R105.2@59.188,91.138 59.188,92.469 ; C76.2@59.188,93.8 59.188,92.469 ; v1(60.812,92.469) 59.188,92.469
NetC77_1: C77.1 R99.2 U7.3 | length 22.1
  Bottom Layer w0.254: U7.3@44.508,100.052 46.812,100.052
  Bottom Layer w0.381: C77.1@37.125,91.138 37.125,92.275 41.5,92.275 ; R99.2@41.5,91.138 41.5,92.275 ; U7.3@44.493,100.038 U7.3@44.508,100.052 ; 46.812,100.052 46.812,92.275 41.5,92.275
NetC78_1: C78.1 R96.1 R104.2 R105.1 | length 17.7
  Bottom Layer w0.381: R96.1@54.938,89.237 54.938,88.037 59.188,88.037 ; R104.2@59.188,86.075 59.188,87.275 ; R105.1@59.188,89.237 59.188,88.037 ; C78.1@63.438,84.175 63.438,82.975 61.313,82.975 61.313,86.213 60.25,87.275 59.188,87.275 ; 59.188,87.275 59.188,88.037
NetC78_2: C78.2 R108.2 R109.1 R110.2 | length 17
  Bottom Layer w0.381: R110.2@63.438,81.012 63.438,82.213 65.563,82.213 65.563,87.275 ; C78.2@63.438,86.075 63.438,87.275 65.563,87.275 ; R108.2@67.687,86.075 67.687,87.275 ; R109.1@67.687,89.237 67.687,87.275 ; 65.563,87.275 67.687,87.275
NetC79_1: C79.1 R109.2 U7.12 | length 27.3
  Top Layer w0.381: v1(62.75,93.125) v1(62.75,99.125)
  Bottom Layer w0.381: U7.12@50.132,100.038 62.75,100.038 v1(62.75,99.125) ; v1(62.75,93.125) 63.313,92.562 63.313,92.275 ; C79.1@63.313,91.138 63.313,92.275 ; R109.2@67.687,91.138 67.687,92.275 63.313,92.275
NetC80_1: C80.1 R111.2 R112.2 R113.1 R117.1 U7.8 | length 69.6
  Top Layer w0.381: v1(78.237,102.638) 78.237,92.462 78.25,92.45 v1(78.244,92.444)
  Bottom Layer w0.254: U7.8@50.132,102.638 52.25,102.637
  Bottom Layer w0.381: 52.25,102.637 52.8,102.637 53.25,102.187 76.625,102.187 77.075,102.638 v1(78.237,102.638) ; v1(78.244,92.444) 79.687,92.444 ; R112.2@81.125,80.987 81.125,82.188 79.687,82.188 79.687,87.25 ; R113.1@81.125,86.05 81.125,87.25 79.687,87.25 ; R111.2@81.125,91.113 81.125,92.444 ; R117.1@81.125,93.775 81.125,92.444 ; C80.1@85.375,95.675 85.375,96.875 83.25,96.875 83.25,92.438 83.244,92.444 81.125,92.444 ; 79.687,87.25 79.687,92.444 ; 79.687,92.444 81.125,92.444
NetC80_2: C80.2 R116.2 U7.9 | length 51.9
  Top Layer w0.381: v1(87.75,92.444) v1(87.75,101.5)
  Bottom Layer w0.254: U7.9@50.132,101.987 52.325,101.987
  Bottom Layer w0.381: 52.325,101.987 52.813,101.5 v1(87.75,101.5) ; R116.2@85.375,91.113 85.375,92.444 ; C80.2@85.375,93.775 85.375,92.444 ; v1(87.75,92.444) 85.375,92.444
NetC81_1: C81.1 R111.1 R115.2 R116.1 | length 17.7
  Bottom Layer w0.381: R111.1@81.125,89.212 81.125,88.012 85.375,88.012 ; R115.2@85.375,86.05 85.375,87.25 ; R116.1@85.375,89.212 85.375,88.012 ; C81.1@89.625,84.15 89.625,82.95 87.5,82.95 87.5,86.188 86.437,87.25 85.375,87.25 ; 85.375,87.25 85.375,88.012
NetC81_2: C81.2 R119.2 R120.1 R121.2 | length 17
  Bottom Layer w0.381: R121.2@89.625,80.987 89.625,82.188 91.75,82.188 91.75,87.25 ; C81.2@89.625,86.05 89.625,87.25 91.75,87.25 ; R119.2@93.875,86.05 93.875,87.25 ; R120.1@93.875,89.212 93.875,87.25 ; 91.75,87.25 93.875,87.25
NetC82_1: C82.1 R120.2 U7.10 | length 52.6
  Bottom Layer w0.254: U7.10@50.132,101.338 51.787,101.338
  Bottom Layer w0.381: 51.787,101.338 52.312,100.813 85.812,100.813 89.5,97.125 89.5,92.25 ; C82.1@89.5,91.113 89.5,92.25 ; R120.2@93.875,91.113 93.875,92.25 89.5,92.25
NetC83_1: C83.1 R122.2 R123.2 R124.1 R128.1 U8.1 | length 38.5
  Top Layer w0.381: v1(109.25,92.562) 110.75,91.063 v1(113.5,91.063)
  Bottom Layer w0.381: R123.2@107.309,80.987 107.309,82.25 106,82.25 106,87.375 ; R124.1@107.309,86.05 107.309,87.365 107.046,87.365 107.036,87.375 106,87.375 ; R122.2@107.309,91.113 107.309,92.5 ; R128.1@107.309,93.775 107.309,92.5 ; v1@109.25,92.5 107.309,92.5 ; v1@109.312,92.562 109.312,96.912 111.174,96.912 C83.1@111.174,95.675 ; v1(113.5,91.063) 113.5,93.845 U8.1@115.575,93.845 ; 106,87.375 106,92.5 107.309,92.5
NetC83_2: C83.2 R127.2 U8.2 | length 9.7
  Bottom Layer w0.381: R127.2@111.174,91.113 111.174,92.444 ; C83.2@111.174,93.775 111.174,92.444 ; U8.2@115.575,95.115 112.75,95.115 112.75,92.444 111.174,92.444